# Allegro board OC_CONNECT_1_FRONTEND_LIFE-3.brd
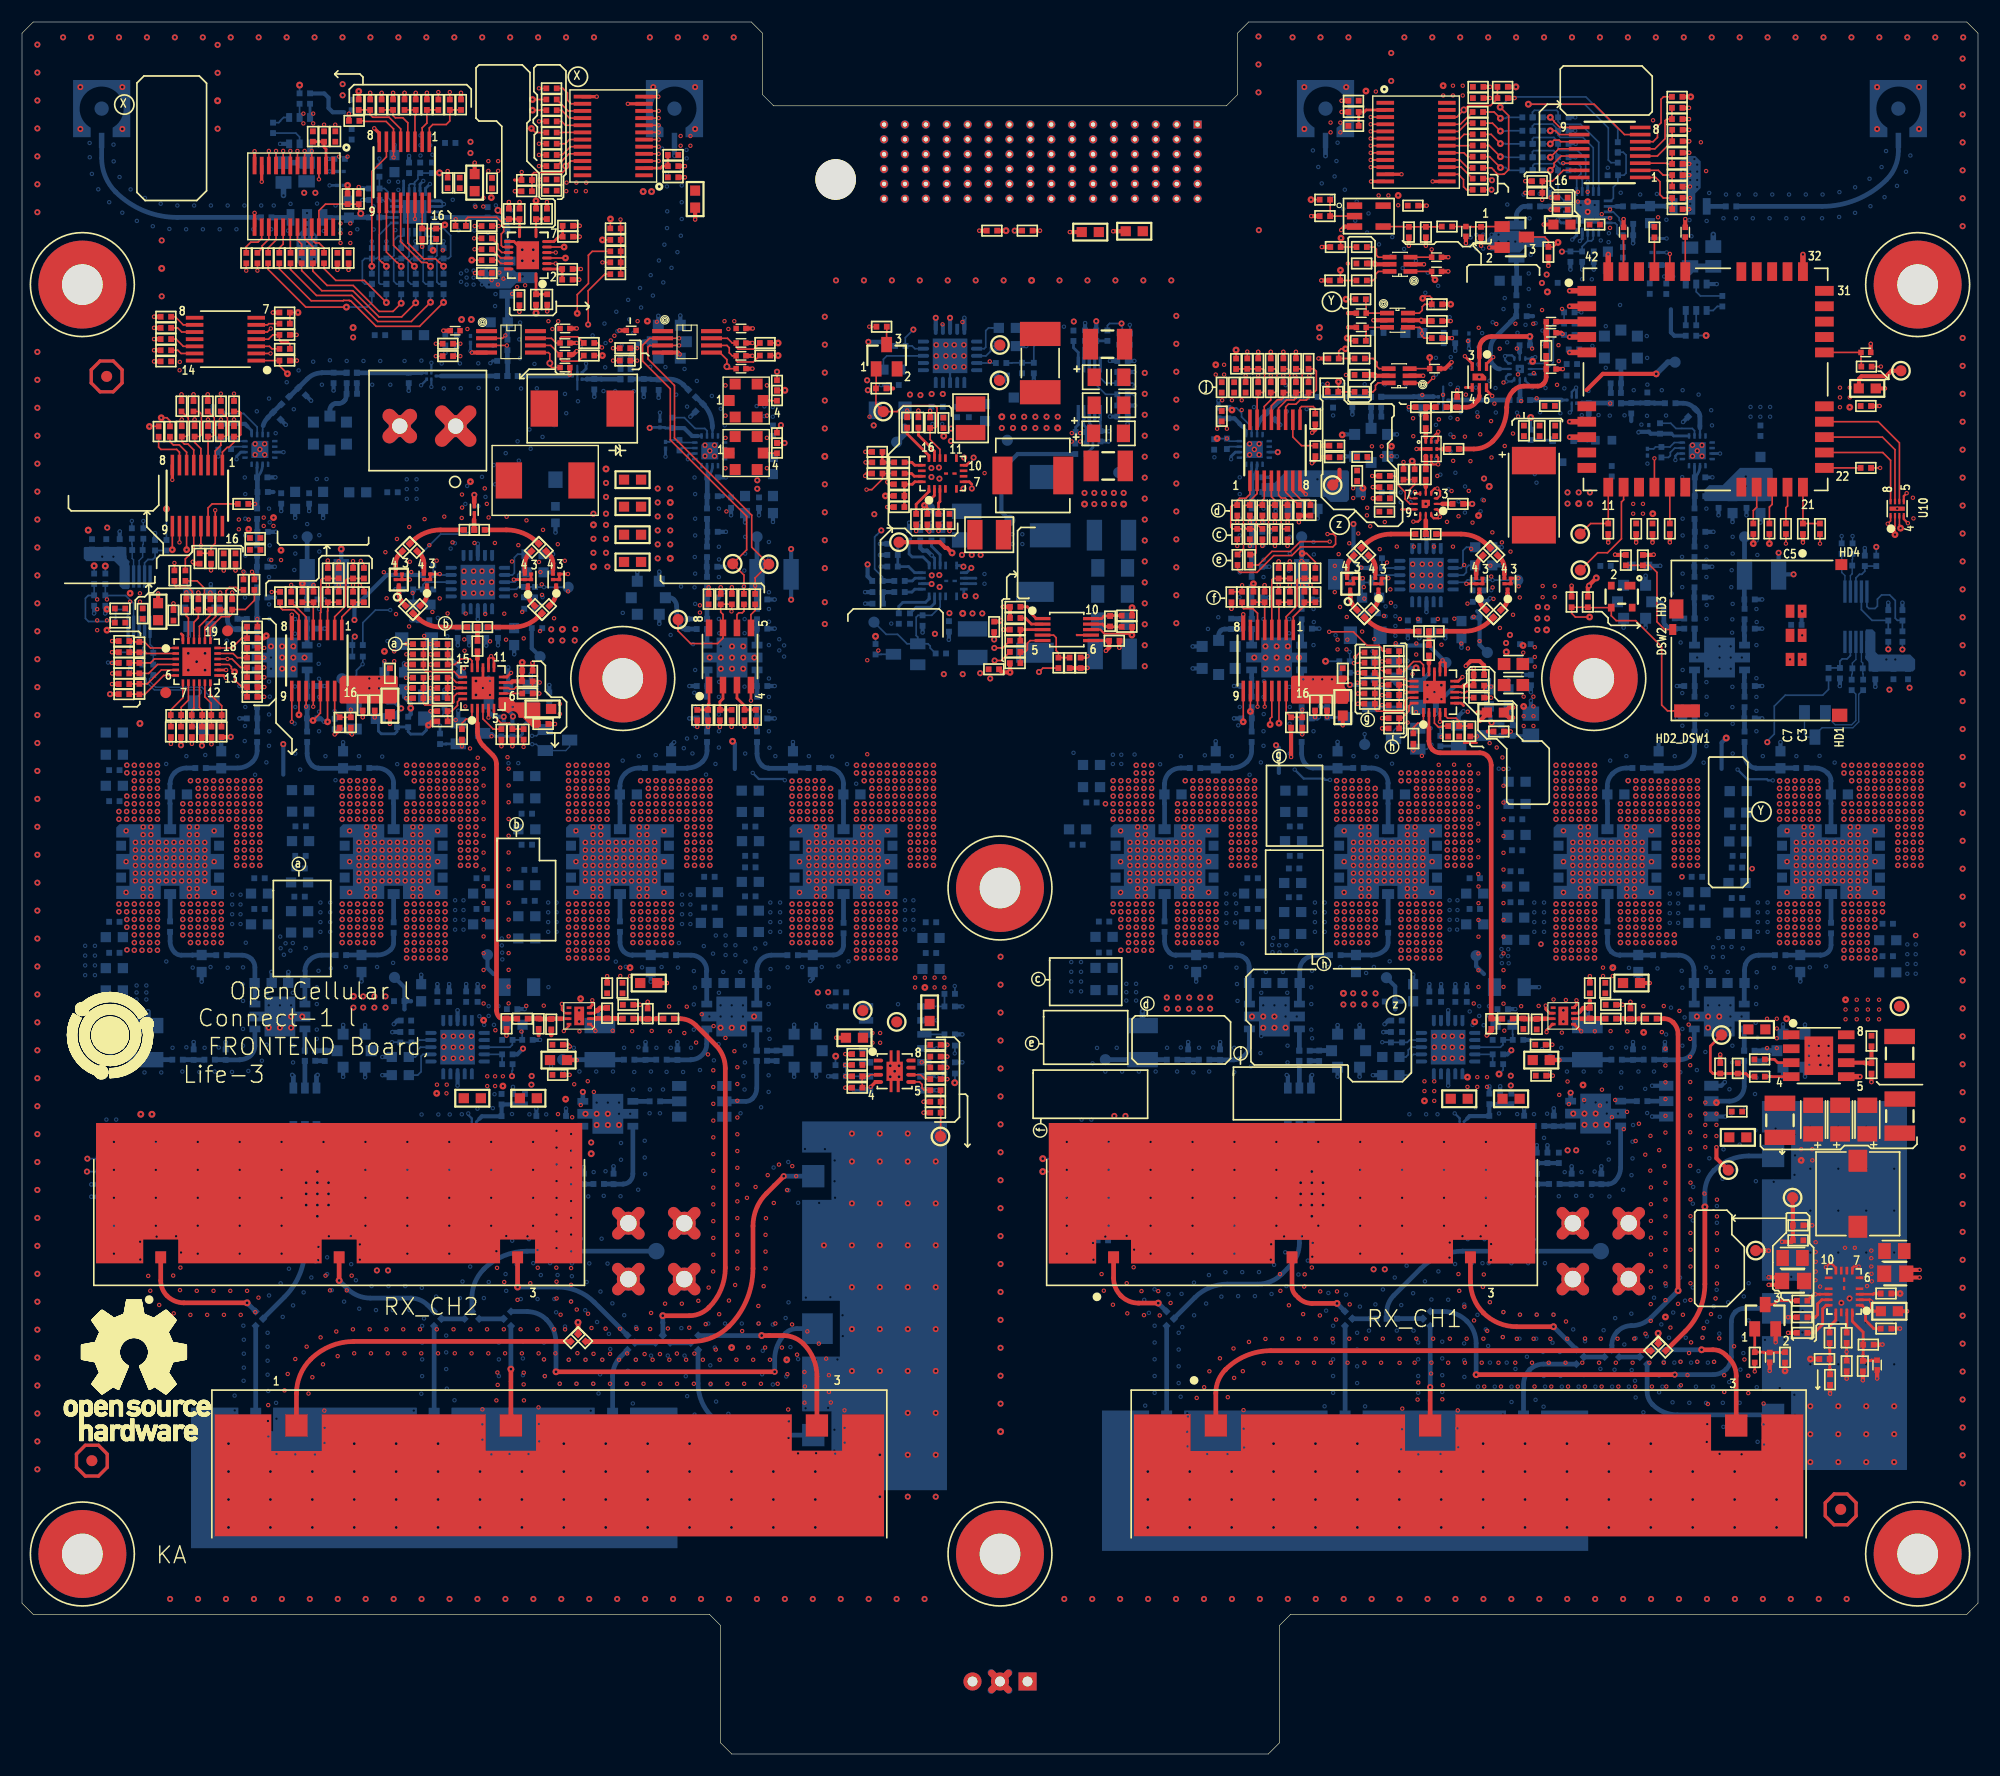
[diagram p0: board, top side]
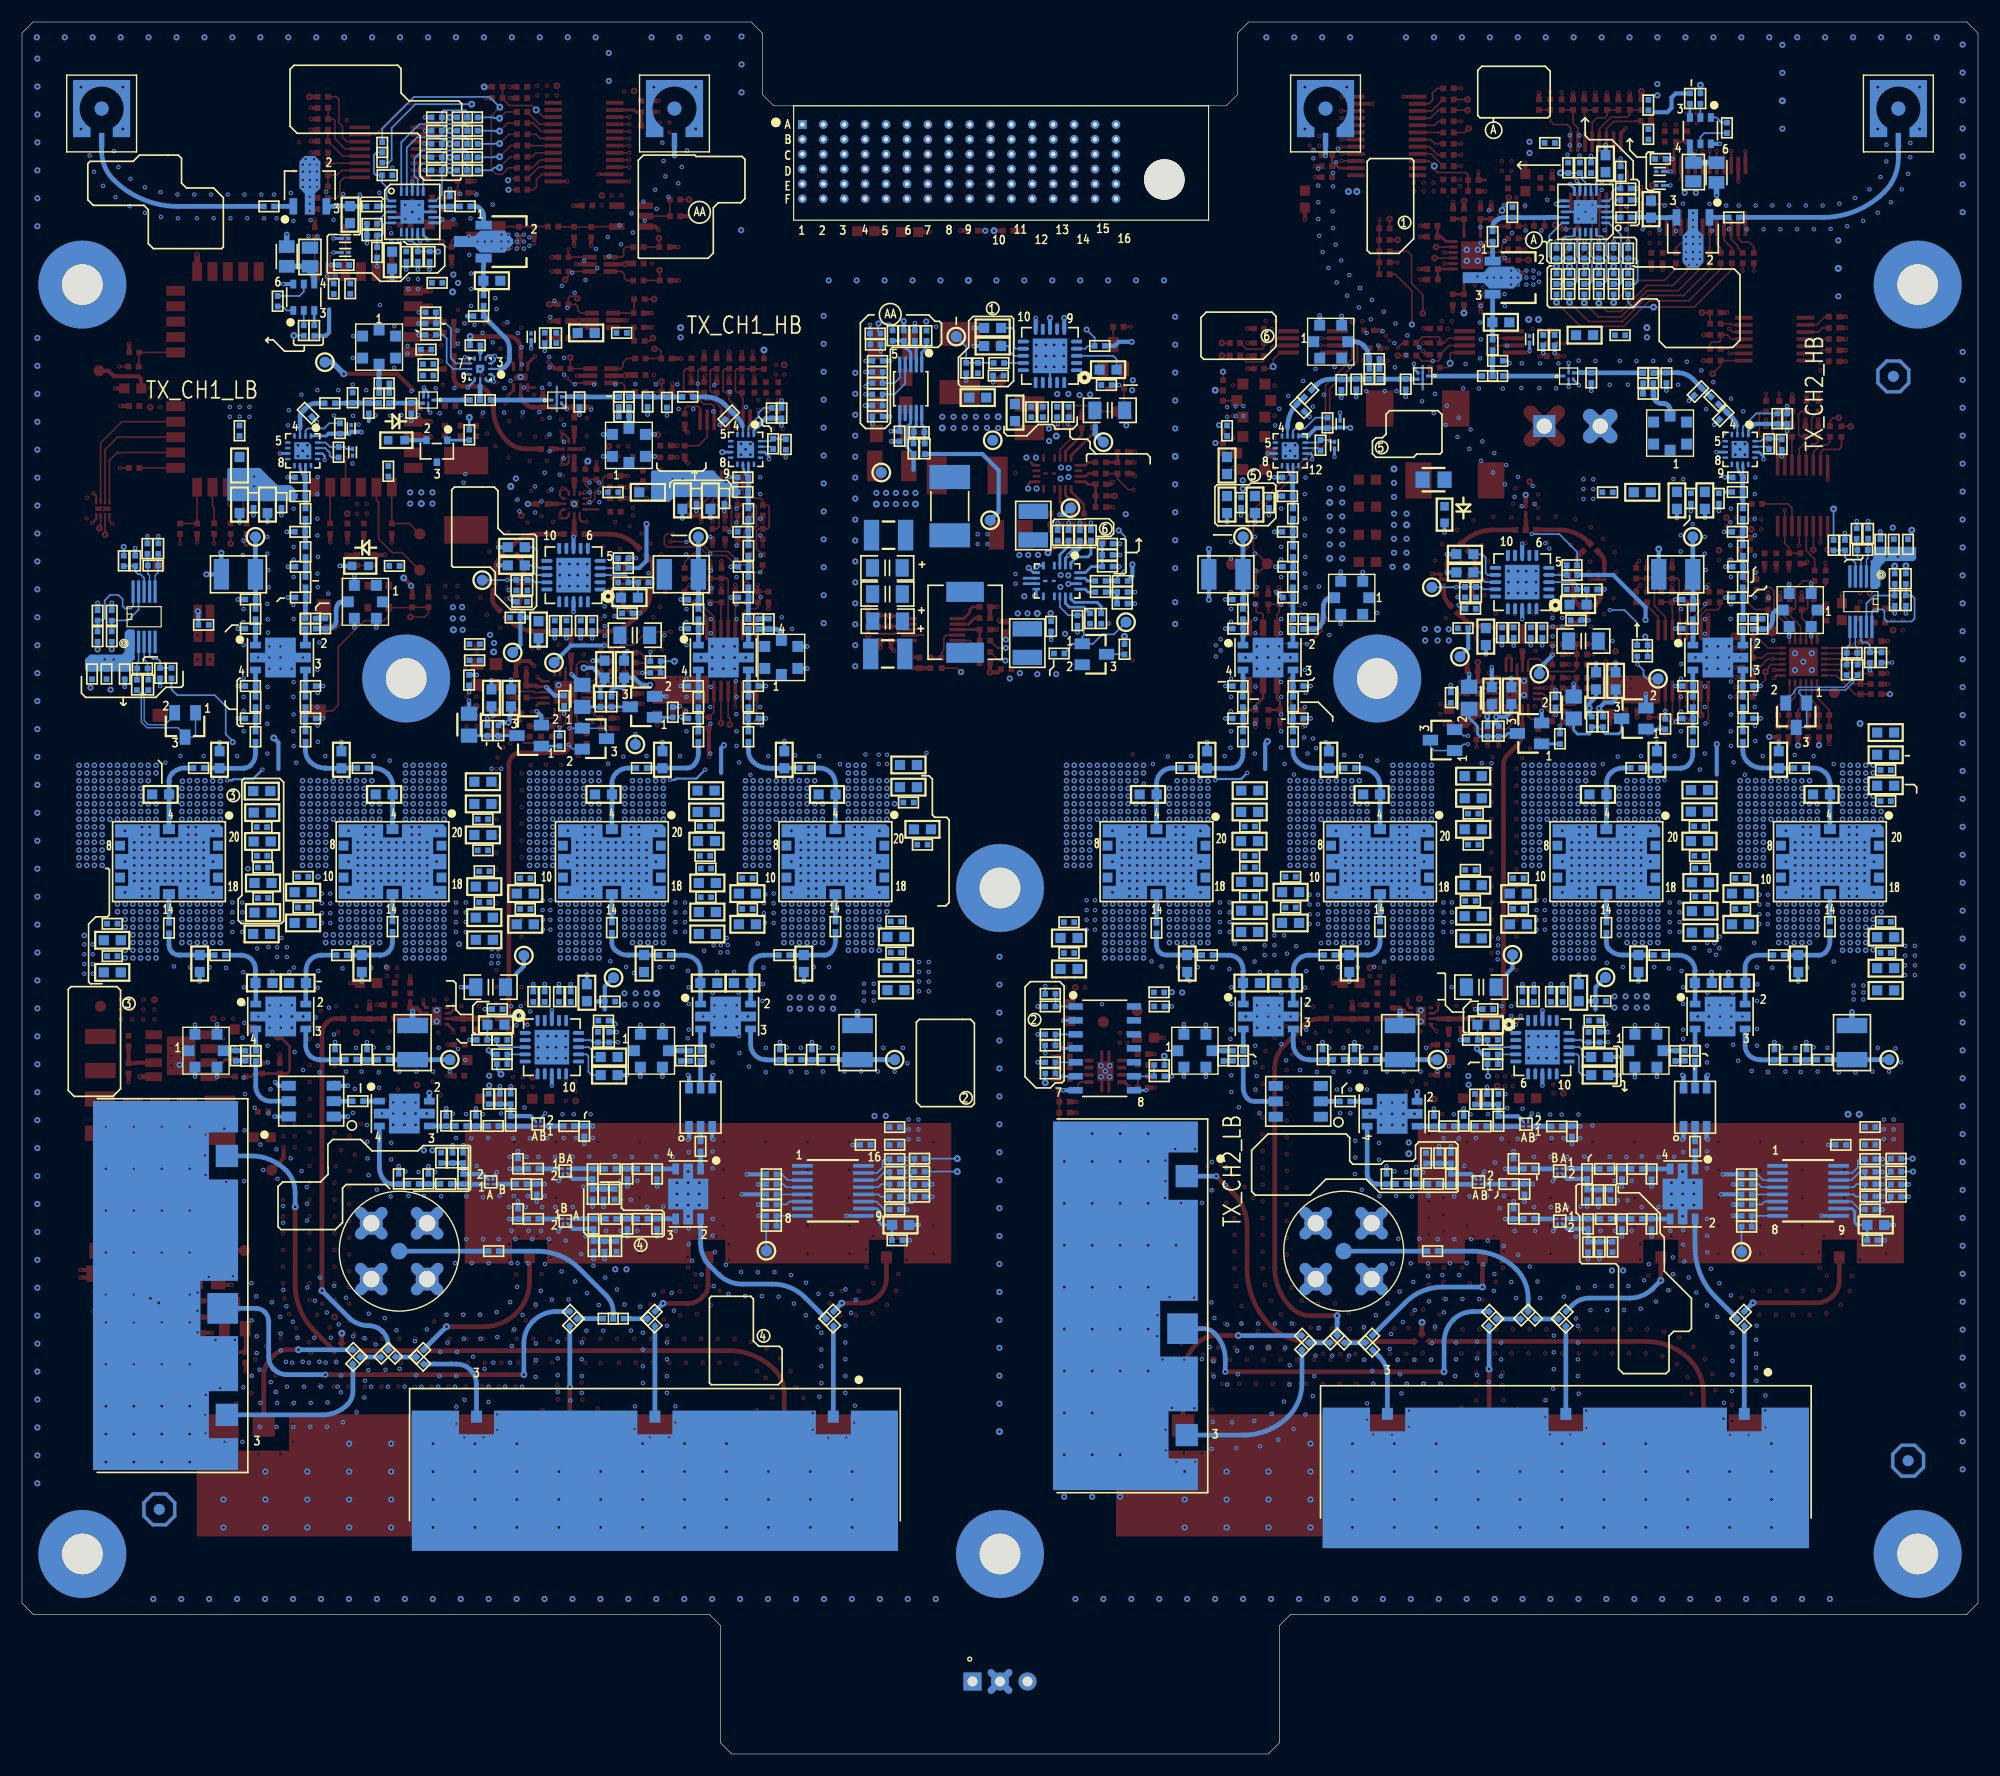
[diagram p1: board, bottom side, seen from below]

Outline 177.8 x 157.48 mm; copper layers: TOP, L2-GND1, L3-SIG1, L4-SIG2, L5-PWR, L6-GND2, L7-SIG3, L8-SIG4, L9-GND3, BOTTOM. Coordinates in mm from the lower left corner of the outline.
Outline path: 0,156.46 0,13.72 1.02,12.7 62.48,12.7 63.5,11.68 63.5,1.02 64.52,0 113.28,0 114.3,1.02 114.3,11.68 115.32,12.7 176.78,12.7 177.8,13.72 177.8,156.46 176.78,157.48 111.51,157.48 110.49,156.46 110.49,150.88 109.47,149.86 68.33,149.86 67.31,150.88 67.31,156.46 66.29,157.48 1.02,157.48 0,156.46

## Design rules (mm)
net group 2GMODULE_RF_ANT: nets 2GMODULE_RF_ANT N19574611
net group DP1: nets CH1_PRE_I2C_2_SCL CH1_PRE_I2C_2_SDA
net group DP2: nets CH1_RF_I2C_4_SCL CH1_RF_I2C_4_SDA
net group DP3: nets CH1_RX_I2C_2_SCL CH1_RX_I2C_2_SDA
net group DP4: nets CH2_PRE_I2C_2_SCL CH2_PRE_I2C_2_SDA
net group DP5: nets CH2_RF_I2C_4_SCL CH2_RF_I2C_4_SDA
net group DP6: nets CH2_RX_I2C_2_SCL CH2_RX_I2C_2_SDA
net group DP7: nets L_TIVA_TRXFECONN_I2C2_SCLK L_TIVA_TRXFECONN_I2C2_SDA
net group DP8: nets L_TIVA_TRXFECONN_I2C2_SCLK_L L_TIVA_TRXFECONN_I2C2_SDA_L
net group DP11: nets L_TIVA_TRXFECONN_I2C4_SCLK L_TIVA_TRXFECONN_I2C4_SDA
net group DP12: nets L_TIVA_TRXFECONN_I2C4_SCLK_L L_TIVA_TRXFECONN_I2C4_SDA_L
net group DP13: nets SYS_I2C_2_SCL SYS_I2C_2_SDA
net group DP15: nets SYS_I2C_4_SCL SYS_I2C_4_SDA
net group DP16: nets WD_I2C_2_SCL WD_I2C_2_SDA
net group DP17: nets STP_I2C_2_SCL STP_I2C_2_SDA
net group N18611317: nets N18611317 N18611323
net group 5 MIL: nets ADT7481_1_D1_N ADT7481_1_D1_N_R ADT7481_1_D1_P ADT7481_1_D1_P_R ADT7481_1_D2_N ADT7481_1_D2_N_R ADT7481_1_D2_P ADT7481_1_D2_P_R ADT7481_D1_N ADT7481_D1_P ADT7481_D2_N ADT7481_D2_P N19733122 N19733158 N19733262 N19733267
net group PWR: nets 3.3_BAT_2G CH1_3P3V_397LF CH1_3P3V_CS CH1_3P3V_DAT2 CH1_3P3V_HB_PD1 CH1_3P3V_HB_PD2 CH1_3P3V_LB_PD1 CH1_3P3V_LB_PD2 CH1_+5P0V_HBPA1_VCTRL CH1_+5P0V_HBPA1_VCTRL_FB CH1_+5P0V_HBPA2_VCTRL CH1_+5P0V_HBPA2_VCTRL_FB CH1_+5P0V_LBPA1_VCTRL CH1_+5P0V_LBPA1_VCTRL_FB CH1_+5P0V_LBPA2_VCTRL CH1_+5P0V_LBPA2_VCTRL_FB CH2_3P3V_CS CH2_3P3V_DAT2 CH2_3P3V_HB_PD1 CH2_3P3V_HB_PD2 CH2_3P3V_LB_PD1 CH2_3P3V_LB_PD2 CH2_+5P0V_HBPA1_VCTRL_FB CH2_+5P0V_HBPA2_VCTRL_FB CH2_+5P0V_LBPA1_VCTRL CH2_+5P0V_LBPA1_VCTRL_FB CH2_+5P0V_LBPA2_VCTRL CH2_+5P0V_LBPA2_VCTRL_FB INV_3P3V LT8640_INT_VCC3 LT8640_INT_VCC_1 LT8640_INT_VCC_2 N04661 N2429678 N4628364 N18610577 N18647521 N18647530 N18648415 N18648424 N18669960 N18670083 N19200579 N19579922 V2P5 V5P7_PRE
net group RF: nets CH1_ATT_OUT CH1_HB_LB_SEL CH1_HB_RF_CON CH1_HBPA_RF_IN CH1_HBPA_RF_PATH1_IN CH1_HBPA_RF_PATH1_OUT CH1_HBPA_RF_PATH2_IN CH1_HBPA_RF_PATH2_OUT CH1_LB_RF_CON CH1_LBPA_RF_IN CH1_LBPA_RF_PATH1_IN CH1_LBPA_RF_PATH1_OUT CH1_LBPA_RF_PATH2_IN CH1_LBPA_RF_PATH2_OUT CH1_PA_HB_ISO CH1_PA_LB_ISO CH1_RF_DET_HB_FWR_IN CH1_RF_DET_HB_REV_IN CH1_RF_DET_LB_FWR_IN CH1_RF_DET_LB_REV_IN CH1_RF_HB_BAND2_IN CH1_RF_HB_BAND2_OUT CH1_RF_HB_BAND3_IN CH1_RF_HB_BAND3_OUT CH1_RF_HB_CPL_OUT CH1_RF_HB_PA_OUT CH1_RF_INTANT CH1_RF_INTANT_C CH1_RF_LB_BAND5_IN CH1_RF_LB_BAND5_OUT CH1_RF_LB_BAND8_IN CH1_RF_LB_BAND8_OUT CH1_RF_LB_CPL_OUT CH1_RF_LB_PA_OUT CH1_RF_RX_OUT CH1_RX_ATTN_IN CH1_RX_ATTN_OUT CH1_RX_FILTER_IN CH1_RX_FILTER_OUT CH1_RX_HB_BAND2 CH1_RX_HB_BAND2_SAWIN CH1_RX_HB_BAND2_SAWOUT CH1_RX_HB_BAND3 CH1_RX_HB_BAND3_SAWIN CH1_RX_HB_BAND3_SAWOUT CH1_RX_LB_BAND5 CH1_RX_LB_BAND5_SAWIN CH1_RX_LB_BAND5_SAWOUT CH1_RX_LB_BAND8 CH1_RX_LB_BAND8_SAWIN CH1_RX_LB_BAND8_SAWOUT CH1_RX_LNA_IN CH1_RX_LNA_OUT CH1_RX_UE_SIM_MODULE CH1_TX_ATT_IN CH1_TX_PREAMP_OUT CH1_TX_RF_IN CH1_TX_RF_IN_C CH1_TX_UE_SIM_MODULE CH1_UE_SIM_ANT CH2_ATT_OUT CH2_HB_RF_CON CH2_HBPA_RF_IN CH2_HBPA_RF_PATH1_IN CH2_HBPA_RF_PATH1_OUT CH2_HBPA_RF_PATH2_IN CH2_HBPA_RF_PATH2_OUT CH2_LB_RF_CON CH2_LBPA_RF_IN CH2_LBPA_RF_PATH1_IN CH2_LBPA_RF_PATH1_OUT CH2_LBPA_RF_PATH2_IN CH2_LBPA_RF_PATH2_OUT CH2_PA_HB_ISO CH2_PA_LB_ISO CH2_RF_DET_HB_FWR_IN CH2_RF_DET_HB_REV_IN CH2_RF_DET_LB_FWR_IN CH2_RF_DET_LB_REV_IN CH2_RF_HB_BAND2_IN CH2_RF_HB_BAND2_OUT CH2_RF_HB_BAND3_IN CH2_RF_HB_BAND3_OUT CH2_RF_HB_CPL_OUT CH2_RF_HB_PA_OUT CH2_RF_INTANT CH2_RF_INTANT_C CH2_RF_LB_BAND5_IN CH2_RF_LB_BAND5_OUT CH2_RF_LB_BAND8_IN CH2_RF_LB_BAND8_OUT CH2_RF_LB_CPL_OUT CH2_RF_LB_PA_OUT CH2_RF_RX_OUT CH2_RX_ATTN_IN CH2_RX_ATTN_OUT CH2_RX_FILTER_IN CH2_RX_FILTER_OUT CH2_RX_HB_BAND2 CH2_RX_HB_BAND2_SAWIN CH2_RX_HB_BAND2_SAWOUT CH2_RX_HB_BAND3 CH2_RX_HB_BAND3_SAWIN CH2_RX_HB_BAND3_SAWOUT CH2_RX_LB_BAND5 CH2_RX_LB_BAND5_SAWIN CH2_RX_LB_BAND5_SAWOUT CH2_RX_LB_BAND8 CH2_RX_LB_BAND8_SAWIN CH2_RX_LB_BAND8_SAWOUT CH2_RX_LNA_IN CH2_TX_ATT_IN CH2_TX_PREAMP_OUT CH2_TX_RF_IN CH2_TX_RF_IN_C N00110 N00143 N00329 N00458 N02075 N02095 N02183 N02223 N04052 N08320 N11655 N12237 N14373 N21578 N25591 N64340 N64506 N64636 N96728 N96732 N96744 N96754 N96832 N96834 N96850 N96940 N96998 N97078 N97090 N147495 N154213 N848823 N2424100 N2424108 N2424140 N2424142 N2424154 N2424178 N2424184 N2424214 N2424216 N2424226 N2438198 N2438200 N2438214 N2438224 N2438262 N2438268 N2438278 N2438330 N2438466 N2438478 N2438588 N2438754 N2442693 N2442695 N2442709 N2442719 N2442759 N2442761 N2442775 N2442777 N2442833 N2442885 N2442965 N2442977 N2447093 N2447239 N2447265 N2452276 N2452306 N2452334 N2452522 N2463012 N2463020 N2463052 N2463054 N2463066 N2463090 N2463096 N2463126 N2463128 N2463138 N3141586 N3404619 N3406573 N3415333 N3417290 N3490489 N3590785 N3590789 N3590859 N3590891 N3590917 N3591163 N3604901 N3605045 N3605211 N3605275 N3605339 N3948020 N17645285 N17646328 N17646554 N17647866 N17649352 N17649550 N17672390 N17683367 N18032513 N18032583 N18032800 N18032879 N18610670 N18610924 N18794636 N18796030 N18854444 N18854583 N19068885 N19069117 N19069446 N19069497 N19121408 N19121856 N19122168 N19122434 N19123805 N19124252 N19125045 N19125667 N19135273 N19135893 N19138223 N19138254 N19138322 N19173620 N19173696 N19175841 N19175884 N19178560 N19180279 N19180630 N19180667 N19188677 N19188736 N19196616 N19198940 N19198946 N19200659 N19584969 N19638038 N19639876 N19640647 N19674022 N19674147 N19674332 N19674512 N19674692 N19674872 N19674973 N19675069 N19675251 N19675433 N19675611 N19675791
net group SIGNAL: nets +IN3 +IN4 +IN5 +IN6 -IN3 -IN4 -IN5 -IN6 AOSEL_FPGA CH1_RF_A/D_A0_CPU CH1_RF_A/D_A1_CPU CH1_RF_DET_HB_F_DET_OUT CH1_RF_DET_HB_R_DET_OUT CH1_RF_DET_LB_F_DET_OUT CH1_RF_DET_LB_R_DET_OUT CH1_RX_ATTN_1DB CH1_RX_ATTN_2DB CH1_RX_ATTN_4DB CH1_RX_ATTN_8DB CH1_RX_ATTN_ENB CH1_RX_ATTN_P5DB CH1_RX_I2C_A0 CH1_TX_ATTN_1DB CH1_TX_ATTN_2DB CH1_TX_ATTN_4DB CH1_TX_ATTN_8DB CH1_TX_ATTN_ENB CH1_TX_ATTN_P5DB CH2_RF_A/D_A0_CPU CH2_RF_A/D_A1_CPU CH2_RF_DET_HB_F_DET_OUT CH2_RF_DET_HB_R_DET_OUT CH2_RF_DET_LB_F_DET_OUT CH2_RF_DET_LB_R_DET_OUT CH2_RX_ATTN_ENB CO2_WD CO3_WD CO4_WD CO5_WD CO6_WD COPOL_FPGA LDO_5V_ENB N04312 N04329 N04350 N05007 N05085 N2429650 N2429652 N2429654 N2429660 N2429710 N2429712 N2463246 N2463410 N3464918 N3470389 N3470663 N4459963 N4459967 N4462045 N4522849 N4523062 N4628420 N19183187 N19183205 PG_REG_5P7V_1 PG_REG_5P7V_2 PGOOD_LDO SHDN_SW

## Placement (name value [footprint] x y rotation side)
ATT2602  YAT10  [SON65P200X200X85-7N_A]  132.47 125.2 180 top
C1P16  0.1UF  [SMC0402A]  54.93 129.44 90 top
C1P17  0.1UF  [SMC0402A]  64.91 129.62 90 top
C1P20  0.1UF  [SMC0402A]  48.91 129.62 90 top
C1P21  0.1UF  [SMC0402A]  38.92 129.41 90 top
C126  47uF  [CAPMP3216X120N]  167.74 57.68 90 top
C141  22uF  [CC1210]  170.69 58 90 top
C154  1000uF  [CAPMP7343X200N_VS]  137.43 114.45 270 top
C157  33pF  [CC0402]  139.36 120.31 270 top
C408  0.1uF  [CC0402]  137.95 120.31 90 top
C409  10nF  [CC0402]  136.53 120.31 90 top
C410  0.1uF  [CC0402]  167.61 122.57 0 top
C411  1uF  [CC0603]  167.73 124.16 0 top
C412  0.1uF  [CC0402]  136.65 100.91 0 bottom
C413  0.1uF  [CC0402]  136.65 99.44 0 bottom
C414  0.1uF  [CC0402]  138.87 122.57 180 top
C415  0.1uF  [CC0402]  121.6 125.39 180 top
C416  0.1uF  [CC0402]  121.77 135.52 180 top
C417  0.1uF  [CC0402]  128.62 130.29 0 top
C420  10PF  [SMC0402A]  139.44 130.24 270 top
C421  10PF  [SMC0402A]  139.44 129.22 270 top
C422  10PF  [SMC0402A]  139.44 125.93 270 top
C492  10pF  [SMC0402A]  168.63 35.81 0 top
C495  0.1uF  [CC0402]  169.44 41.87 0 top
C498  1uF  [CC0805]  160.99 43 180 top
C499  1uF  [CC0805]  170.28 43.67 0 top
C500  1uF  [CC0603]  169.74 40.26 0 top
C501  0.1uF  [CC0402]  161.82 38.29 180 top
C510  47uF  [CAPMP3216X120N]  165.27 57.68 90 top
C511  47uF  [CAPMP3216X120N]  162.81 57.68 90 top
C512  0.1uF  [CC0402]  161.29 102.67 180 bottom
C513  22uF  [CC1210]  159.8 57.62 90 top
C697  0.1uF  [C0402]  88.17 138.51 180 top
C698  0.1uF  [C0402]  91.39 138.51 0 top
C1506  1000pF  [C0201]  148.43 136.53 0 bottom
C1507  1000pF  [C0201]  28.94 143.89 180 bottom
C1519  100nF  [C0201]  148.43 137.79 0 bottom
C1520  100nF  [C0201]  28.94 142.62 180 bottom
C1802  10000pF  [C0603]  97.95 48.1 180 bottom
C1885  0.1uF  [CC0402]  157.5 36.06 270 top
C1913  0.1uF  [C0402]  96.25 120.2 0 bottom
C1914  10uF  [C0603]  12.37 103.86 90 top
C1931  10uF  [C0805]  170.2 45.73 0 top
C1932  10uF  [C0805]  160.94 45.1 180 top
C1975  1uF  [CC0603]  157.7 65.89 0 top
C1976  10uF  [CC1210]  170.67 63.69 270 top
C1977  0.1uF  [CC0402]  148.21 111.4 90 top
C1978  0.1uF  [CC0402]  146.72 111.4 90 top
C2002  10000pF  [C0603]  9.3 48.1 180 bottom
C2041  0.1uF  [CC0402]  126.44 140.78 0 top
C2042  0.1uF  [CC0402]  132.62 138.38 270 top
C2095  4.7uF  [C0805]  23.77 143.79 270 bottom
C2106  0.1uF  [C0402]  13.08 126.62 180 top
C2113  0.1uF  [C0402]  98.91 103 270 top
C2120  0.1uF  [CC0402]  155.89 58.41 180 top
C2200  10pF  [C0402]  108.37 119.07 270 bottom
C2201  10000pF  [C0603]  115.23 113.98 270 bottom
C2202  10uF  [C0603]  117.77 113.98 270 bottom
C2203  33pF  [C0402]  113.96 114.16 270 bottom
C2204  2.2uF  [C0402]  116.5 114.16 270 bottom
C2205  10pF  [C0402]  108.76 121.92 90 bottom
C2206  10pF  [C0402]  111.77 112.78 270 bottom
C2207  10pF  [C0402]  111.77 109.42 270 bottom
C2210  3.3PF  [C0402]  117.28 123.39 180 bottom
C2213  0.5pF  [C0402]  112.27 116.08 0 bottom
C2214  1pF  [C0402]  113.56 121.67 315 bottom
C2215  33pF  [C0402]  146.01 140.71 0 bottom
C2219  33pF  [C0402]  154.22 113.78 270 bottom
C2220  100pF  [C0201]  147.75 118.36 270 bottom
C2221  10000pF  [C0603]  155.49 113.6 270 bottom
C2222  2.2uF  [C0402]  156.76 113.78 270 bottom
C2223  10uF  [C0603]  158.03 113.6 270 bottom
C2224  10000pF  [C0603]  144.15 135.83 270 bottom
C2228  100pF  [C0402]  152.03 112.78 270 bottom
C2230  10pF  [C0402]  149.82 122.82 0 bottom
C2233  2.7PF  [C0402]  151.8 121.92 225 bottom
C2234  0.5pF  [C0402]  152.53 116.08 0 bottom
C2235  10000pF  [C0603]  139.98 139.06 180 top
C2236  10pF  [C0402]  135.69 123.11 180 bottom
C2237  47pF  [C0402]  136.61 123.11 0 bottom
C2240  2.2uF  [C0402]  129.24 128.75 270 bottom
C2241  10pF  [C0402]  130.28 128.75 270 bottom
C2242  0.1uF  [C0201]  131.52 128.85 270 bottom
C2245  100pF  [C0201]  147.88 120.52 90 bottom
C2301  10uF  [C0603]  97.22 87.91 0 bottom
C2302  2.2uF  [C0402]  97.22 86.51 0 bottom
C2303  10000pF  [C0603]  95.95 84.07 180 bottom
C2304  33pF  [C0402]  95.95 82.68 180 bottom
C2305  33pF  [C0402]  111.86 79.63 0 bottom
C2306  10000pF  [C0603]  111.86 78.23 0 bottom
C2307  2.2uF  [C0402]  111.86 76.84 0 bottom
C2308  10uF  [C0603]  111.86 75.44 0 bottom
C2310  33pF  [C0402]  106.63 89.65 180 bottom
C2311  10pF  [C0402]  108.53 72.63 0 bottom
C2313  10000pF  [C0603]  106.73 71.87 270 bottom
C2314  10000pF  [C0603]  104.62 87.25 0 bottom
C2315  33pF  [C0402]  98.36 75.69 0 bottom
C2316  10000pF  [C0603]  98.36 74.3 0 bottom
C2317  2.2uF  [C0402]  98.36 72.87 0 bottom
C2318  10uF  [C0603]  98.36 71.48 0 bottom
C2319  10uF  [C0603]  115.61 85.65 180 bottom
C2320  2.2uF  [C0402]  115.71 84.34 180 bottom
C2321  10000pF  [C0603]  115.58 83 180 bottom
C2322  33pF  [C0402]  115.71 81.66 180 bottom
C2323  33pF  [C0402]  115.63 80.52 180 bottom
C2324  10000pF  [C0603]  132.05 78.23 0 bottom
C2325  2.2uF  [C0402]  132.05 76.84 0 bottom
C2326  10uF  [C0603]  132.05 75.44 0 bottom
C2329  10pF  [C0402]  119.38 72.63 180 bottom
C2330  33pF  [C0402]  121.49 89.65 0 bottom
C2332  10000pF  [C0603]  121.26 71.87 270 bottom
C2333  10000pF  [C0603]  124.94 87.25 0 bottom
C2335  33pF  [C0402]  132.05 79.63 0 bottom
C2336  10000pF  [C0603]  115.5 79.2 180 bottom
C2337  2.2uF  [C0402]  115.63 77.9 180 bottom
C2338  10uF  [C0603]  115.5 76.56 180 bottom
C2400  10uF  [C0603]  135.9 86.39 180 bottom
C2401  2.2uF  [C0402]  135.9 84.99 180 bottom
C2402  10000pF  [C0603]  135.9 83.57 180 bottom
C2403  33pF  [C0402]  135.9 82.17 180 bottom
C2404  33pF  [C0402]  135.78 80.26 180 bottom
C2405  10000pF  [C0603]  152.25 78.36 0 bottom
C2406  2.2uF  [C0402]  135.78 77.44 180 bottom
C2407  10uF  [C0603]  152.25 75.56 0 bottom
C2410  100pF  [C0402]  146.86 89.65 180 bottom
C2411  12pF  [C0402]  148.74 72.63 0 bottom
C2413  10000pF  [C0603]  144.88 87.25 0 bottom
C2414  10000pF  [C0603]  146.91 71.87 270 bottom
C2415  33pF  [C0402]  152.25 79.76 0 bottom
C2416  10000pF  [C0603]  135.78 78.87 180 bottom
C2417  2.2uF  [C0402]  152.25 76.96 0 bottom
C2418  10uF  [C0603]  135.78 76.05 180 bottom
C2419  10uF  [C0603]  155.96 85.6 180 bottom
C2420  2.2uF  [C0402]  155.99 84.27 180 bottom
C2421  10000pF  [C0603]  155.97 82.97 180 bottom
C2422  33pF  [C0402]  155.97 81.66 180 bottom
C2423  33pF  [C0402]  155.89 80.59 180 bottom
C2424  10000pF  [C0603]  155.89 79.2 180 bottom
C2425  2.2uF  [C0402]  169.6 72.54 180 bottom
C2426  10uF  [C0603]  169.6 71.07 180 bottom
C2432  10000pF  [C0603]  165.2 87.25 0 bottom
C2433  10000pF  [C0603]  161.65 71.87 270 bottom
C2435  33pF  [C0402]  169.6 75.49 180 bottom
C2436  10000pF  [C0603]  169.6 73.99 180 bottom
C2437  2.2uF  [C0402]  155.89 77.83 180 bottom
C2438  10uF  [C0603]  155.89 76.5 180 bottom
C2439  100pF  [C0402]  161.75 89.65 0 bottom
C2500  100pF  [C0402]  138.02 64.49 180 top
C2501  10000pF  [C0603]  138.1 63.09 0 top
C2509  10000pF  [C0603]  133.93 94.69 0 top
C2515  10000pF  [C0603]  120.06 95.19 270 top
C2601  33pF  [C0402]  125.85 46.15 270 bottom
C2603  33pF  [C0402]  132.72 49.11 90 bottom
C2606  33pF  [C0402]  125.93 50.89 270 bottom
C2608  33pF  [C0402]  132.72 53.67 90 bottom
C2610  33pF  [C0402]  133.38 59.56 90 bottom
C2612  33pF  [C0402]  126.7 56.63 270 bottom
C2613  33pF  [C0402]  137.7 54.2 90 bottom
C2615  33pF  [C0402]  131.01 51.36 270 bottom
C2800  10pF  [C0402]  17.84 119.07 270 bottom
C2801  33pF  [C0402]  23.56 114.16 270 bottom
C2802  10000pF  [C0603]  24.83 113.98 270 bottom
C2803  2.2uF  [C0402]  26.1 114.16 270 bottom
C2804  10uF  [C0603]  27.37 113.98 270 bottom
C2805  10pF  [C0402]  17.35 121.41 90 bottom
C2806  10pF  [C0402]  21.37 112.78 270 bottom
C2807  10pF  [C0402]  21.37 109.42 270 bottom
C2810  3.3PF  [C0402]  23.93 123.06 225 bottom
C2813  0.5pF  [C0402]  21.83 116.08 0 bottom
C2814  33pF  [C0402]  32 139.71 0 bottom
C2815  1pF  [C0402]  23.16 121.67 315 bottom
C2819  33pF  [C0402]  64.45 113.78 270 bottom
C2820  10000pF  [C0603]  65.72 113.6 270 bottom
C2821  2.2uF  [C0402]  66.99 113.78 270 bottom
C2822  10uF  [C0603]  68.26 113.6 270 bottom
C2823  10000pF  [C0603]  33.86 144.6 90 bottom
C2824  100pF  [C0201]  58.5 119 270 bottom
C2828  100pF  [C0402]  62.27 112.78 270 bottom
C2830  10pF  [C0402]  60.91 123.7 315 bottom
C2833  2.7PF  [C0402]  61.57 122.4 225 bottom
C2834  0.5pF  [C0402]  62.77 116.08 0 bottom
C2835  10000pF  [C0603]  41.15 142.88 90 top
C2836  10pF  [C0402]  43.67 125.29 180 bottom
C2837  100pF  [C0402]  44.58 125.29 180 bottom
C2840  2.2uF  [C0402]  38.48 128.55 270 bottom
C2841  10pF  [C0402]  39.52 128.55 270 bottom
C2842  0.1uF  [C0201]  40.77 128.63 270 bottom
C2845  100pF  [C0201]  57.99 120.92 90 bottom
C2901  10uF  [C0603]  8.39 90.86 0 bottom
C2902  2.2uF  [C0402]  8.39 89.46 0 bottom
C2903  10000pF  [C0603]  8.39 88.04 0 bottom
C2904  33pF  [C0402]  8.39 86.64 0 bottom
C2905  33pF  [C0402]  8.39 75.67 0 bottom
C2906  10000pF  [C0603]  8.39 74.27 0 bottom
C2907  2.2uF  [C0402]  8.39 72.85 0 bottom
C2908  10uF  [C0603]  8.39 71.45 0 bottom
C2910  33pF  [C0402]  16.23 89.65 180 bottom
C2911  10pF  [C0402]  18.14 72.63 0 bottom
C2912  10000pF  [C0603]  16.33 71.87 270 bottom
C2914  10000pF  [C0603]  14.22 87.25 0 bottom
C2915  33pF  [C0402]  21.59 79.63 0 bottom
C2916  10000pF  [C0603]  21.59 78.23 0 bottom
C2917  2.2uF  [C0402]  21.59 76.84 0 bottom
C2918  10uF  [C0603]  21.59 75.44 0 bottom
C2919  10uF  [C0603]  25.32 85.68 180 bottom
C2920  2.2uF  [C0402]  25.33 84.35 180 bottom
C2921  10000pF  [C0603]  25.32 83 180 bottom
C2922  33pF  [C0402]  25.31 81.66 180 bottom
C2923  33pF  [C0402]  25.23 80.52 180 bottom
C2924  10000pF  [C0603]  25.23 79.25 180 bottom
C2925  2.2uF  [C0402]  25.23 77.95 180 bottom
C2926  10uF  [C0603]  25.23 76.63 180 bottom
C2929  33pF  [C0402]  31.09 89.65 0 bottom
C2930  10pF  [C0402]  28.98 72.63 180 bottom
C2932  10000pF  [C0603]  30.86 71.87 270 bottom
C2933  10000pF  [C0603]  34.54 87.25 0 bottom
C2935  33pF  [C0402]  41.78 79.63 0 bottom
C2936  10000pF  [C0603]  41.78 78.23 0 bottom
C2937  2.2uF  [C0402]  41.78 76.84 0 bottom
C2938  10uF  [C0603]  41.78 75.44 0 bottom
C3000  10uF  [C0603]  45.89 86.89 180 bottom
C3001  2.2uF  [C0402]  45.89 85.5 180 bottom
C3002  10000pF  [C0603]  45.89 84.07 180 bottom
C3003  33pF  [C0402]  45.89 82.68 180 bottom
C3004  33pF  [C0402]  46.14 80.39 180 bottom
C3005  10000pF  [C0603]  45.89 78.99 180 bottom
C3006  2.2uF  [C0402]  46.14 77.57 180 bottom
C3007  10uF  [C0603]  45.89 76.17 180 bottom
C3010  100pF  [C0402]  57.1 89.65 180 bottom
C3013  10000pF  [C0603]  55.12 87.25 0 bottom
C3014  10000pF  [C0603]  57.15 71.87 270 bottom
C3015  33pF  [C0402]  62.48 79.76 0 bottom
C3016  10000pF  [C0603]  62.48 78.36 0 bottom
C3017  2.2uF  [C0402]  62.48 76.96 0 bottom
C3018  10uF  [C0603]  62.48 75.56 0 bottom
C3019  10uF  [C0603]  66.21 85.65 180 bottom
C3020  2.2uF  [C0402]  66.2 84.32 180 bottom
C3021  10000pF  [C0603]  66.22 83 180 bottom
C3022  33pF  [C0402]  66.21 81.66 180 bottom
C3023  33pF  [C0402]  66.2 80.62 180 bottom
C3024  10000pF  [C0603]  66.2 79.3 180 bottom
C3025  2.2uF  [C0402]  66.2 77.98 180 bottom
C3026  10uF  [C0603]  66.2 76.68 180 bottom
C3030  100pF  [C0402]  71.98 89.65 0 bottom
C3032  10000pF  [C0603]  75.44 87.25 0 bottom
C3033  10000pF  [C0603]  71.88 71.87 270 bottom
C3035  33pF  [C0402]  82.62 75.62 0 bottom
C3036  10000pF  [C0603]  82.62 74.2 0 bottom
C3037  2.2uF  [C0402]  82.62 72.83 0 bottom
C3038  10uF  [C0603]  82.62 71.38 0 bottom
C3109  10000pF  [C0603]  47.32 95.02 0 top
C3112  100pF  [C0201]  41.11 113.13 270 top
C3115  10000pF  [C0603]  33.44 95.32 270 top
C3201  33pF  [C0402]  35.45 46.1 270 bottom
C3203  33pF  [C0402]  42.21 49.11 90 bottom
C3206  33pF  [C0402]  35.53 50.84 270 bottom
C3208  33pF  [C0402]  42.21 53.67 90 bottom
C3209  33pF  [C0402]  140.88 126.38 0 bottom
C3210  33pF  [C0402]  43.59 59.54 90 bottom
C3212  33pF  [C0402]  36.91 56.61 270 bottom
C3213  33pF  [C0402]  47.91 54.18 90 bottom
C3215  33pF  [C0402]  41.22 51.36 270 bottom
C3500  10uF  [CAPC3225X270N]  86.42 101 270 bottom
C3501  10uF  [CAPC3225X270N]  85.87 111.69 90 bottom
C3502  1uF  [C0402]  84.26 102.53 270 bottom
C3503  0.1uF  [C0402]  82.67 110.8 90 bottom
C3504  1uF  [C0402]  83.67 110.8 90 bottom
C3505  22uF  [CC1210]  99.1 100.02 0 bottom
C3506  47uF  [C1206]  99.12 103 0 bottom
C3507  47uF  [C1206]  99.13 105.47 0 bottom
C3508  47uF  [C1206]  99.14 107.84 0 bottom
C3509  22uF  [CC1210]  99.03 110.82 0 bottom
C3510  1uF  [C0402]  81.65 110.8 90 bottom
C3511  0.1uF  [C0402]  79.7 103.24 270 bottom
C3512  10pF  [C0402]  79.13 110.04 180 bottom
C3513  10uF  [CAPC3225X270N]  87.92 110.86 0 top
C3514  10uF  [CAPC3225X270N]  86.23 121.45 90 top
C3515  1uF  [C0402]  84.31 112.28 270 top
C3516  0.1uF  [C0402]  83.31 112.28 270 top
C3517  1uF  [C0402]  83.76 121.03 90 top
C3518  22uF  [CC1210]  98.73 117.12 0 top
C3519  47uF  [C1206]  98.77 120.08 0 top
C3520  47uF  [C1206]  98.81 122.64 0 top
C3521  47uF  [C1206]  98.81 125.18 0 top
C3522  22uF  [CC1210]  98.67 128.19 0 top
C3523  1uF  [C0402]  82.29 112.28 270 top
C3524  0.1uF  [C0402]  80.46 121.07 90 top
C3525  10pF  [C0402]  79.73 113.38 180 top
C3600  10uF  [C0603]  130.85 102.23 270 bottom
C3604  10000pF  [C0603]  122.59 105.14 180 bottom
C3608  22uF  [C1206]  122.1 101.72 180 bottom
C3609  10uF  [C0603]  132.87 109.73 0 bottom
C3610  10000pF  [C0603]  132.87 108.07 0 bottom
C3611  10uF  [C0603]  126.46 69.22 90 bottom
C3615  10000pF  [C0603]  134.72 66.31 0 bottom
C3619  22uF  [C1206]  135.2 69.73 0 bottom
C3620  10uF  [C0603]  124.43 61.72 180 bottom
C3621  10000pF  [C0603]  124.43 63.38 180 bottom
C3800  10uF  [C0603]  44.74 101.6 270 bottom
C3804  10000pF  [C0603]  36.35 104.51 180 bottom
C3808  22uF  [C1206]  35.87 101.19 180 bottom
C3809  10uF  [C0603]  46.64 109.09 0 bottom
C3810  10000pF  [C0603]  46.64 107.44 0 bottom
C3811  10uF  [C0603]  36.29 69.22 90 bottom
C3815  10000pF  [C0603]  44.73 66.31 0 bottom
C3819  22uF  [C1206]  45.16 69.73 0 bottom
C3820  10uF  [C0603]  34.39 61.72 180 bottom
C3821  10000pF  [C0603]  34.39 63.38 180 bottom
C4013  1uF  [C0402]  83.03 64.49 0 top
C4018  4.7uF  [C0603]  75.67 65.13 180 top
C4019  10000pF  [C0402]  83.03 61.36 0 top
C4100  10uF  [C0603]  87.54 121.97 270 bottom
C4104  10000pF  [C0603]  79.08 125.87 180 bottom
C4108  22uF  [C1206]  78.92 122.17 180 bottom
C4109  10uF  [C0603]  89.57 129.66 0 bottom
C4110  10000pF  [C0603]  89.57 128.01 0 bottom
C4200  0.1uF  [C0402]  137.16 97.65 90 bottom
C4201  0.1uF  [C0402]  74.42 67.97 180 bottom
C4203  0.1uF  [C0402]  128.52 95.77 270 bottom
C4206  0.1uF  [C0402]  47.93 96.05 270 bottom
C4208  0.1uF  [C0402]  38.4 95.62 270 bottom
C4317  4.7uF  [C0805]  153.74 136.16 270 bottom
C4393  47pF  [C0402]  148.4 36.99 225 top
C4394  47pF  [C0402]  149.08 36.99 315 top
C4395  10pF  [C0402]  104.37 39.26 225 bottom
C4396  10pF  [C0402]  104.37 39.91 135 bottom
C4397  10pF  [C0402]  50.22 37.85 225 top
C4398  10pF  [C0402]  50.89 37.85 315 top
C4399  10pF  [C0402]  21.58 39.9 135 bottom
C4400  10pF  [C0402]  21.57 39.26 225 bottom
C4401  47pF  [C0402]  127.68 39.26 135 bottom
C4402  47pF  [C0402]  127.68 39.91 225 bottom
C4403  10pF  [C0402]  120.59 39.26 45 bottom
C4404  10pF  [C0402]  120.59 39.91 315 bottom
C4411  10pF  [C0402]  26.17 63.94 0 bottom
C4413  10pF  [C0402]  151.57 102.32 180 bottom
C4414  10pF  [C0402]  157.01 63.94 0 bottom
C4415  10pF  [C0402]  111.32 102.29 180 bottom
C4416  10pF  [C0402]  116.57 63.94 0 bottom
C4419  100pF  [C0402]  152.03 109.3 270 bottom
C4420  100pF  [C0402]  62.27 109.3 270 bottom
C4421  100pF  [C0402]  144.12 75.23 270 bottom
C4422  100pF  [C0402]  164.44 75.1 270 bottom
C4423  100pF  [C0402]  54.36 75.23 270 bottom
C4424  100pF  [C0402]  74.68 75.1 270 bottom
C4425  10pF  [C0402]  155.35 140.71 180 bottom
C4426  10pF  [C0402]  22.2 139.71 180 bottom
C4428  0.1uF  [C0402]  42.25 134.66 180 top
C4429  0.1uF  [C0402]  45.21 132.21 270 top
C4430  10uF  [C0603]  61.19 141.38 90 top
C4432  10uF  [C0603]  97.1 138.38 0 top
C4433  0.1uF  [C0402]  121.03 150.32 180 top
C4434  0.1uF  [C0402]  132.36 150.56 0 top
C4435  1uF  [C0402]  132.36 151.58 0 top
C4436  0.1uF  [C0402]  28.47 147.07 90 top
C4437  0.1uF  [C0402]  28.67 136.02 270 top
C4438  1uF  [C0402]  29.69 136.02 270 top
C4439  0.1uF  [C0402]  59.18 143.36 0 top
C4440  0.1uF  [C0402]  48.13 143.16 180 top
C4441  1uF  [C0402]  48.13 142.14 180 top
C4447  47pF  [C0402]  152.03 102.78 270 bottom
C4449  47pF  [C0402]  147.27 59.36 180 bottom
C4450  10pF  [C0402]  111.77 102.74 270 bottom
C4452  10pF  [C0402]  116.12 55.25 270 bottom
C4453  10pF  [C0402]  61.81 102.29 180 bottom
C4454  10pF  [C0402]  67.25 63.94 0 bottom
C4455  10pF  [C0402]  62.27 102.74 270 bottom
C4457  10pF  [C0402]  57.53 59.34 180 bottom
C4458  10pF  [C0402]  20.92 102.29 180 bottom
C4459  10pF  [C0402]  21.37 102.74 270 bottom
C4461  10pF  [C0402]  25.72 55.25 270 bottom
C4462  10pF  [C0402]  29.51 125.12 270 bottom
C4463  10pF  [C0402]  55.32 125.46 90 bottom
C4464  10pF  [C0402]  122.63 122.94 270 bottom
C4465  10pF  [C0402]  145.34 123.28 90 bottom
C4470  12pF  [C0402]  159.82 72.63 180 bottom
C4471  12pF  [C0402]  58.98 72.63 0 bottom
C4472  12pF  [C0402]  70.05 72.63 180 bottom
C4477  0.1uF  [C0402]  119.31 118.96 180 top
C4478  10pF  [C0402]  134.93 45.72 0 bottom
C4480  47pF  [C0402]  130.14 118.66 0 top
C4481  10pF  [C0402]  127.6 116.33 270 top
C4482  47pF  [C0402]  136.61 128.09 180 bottom
C4488  47pF  [C0402]  156.55 63.49 270 bottom
C4489  10pF  [C0402]  66.79 63.49 270 bottom
C4490  10pF  [C0402]  116.12 63.49 270 bottom
C4491  10pF  [C0402]  25.72 63.49 270 bottom
C4493  33pF  [C0402]  123.87 115.19 180 top
C4499  100pF  [C0402]  135.03 66.86 0 top
C4500  20pF  [C0402]  144.42 66.86 0 top
C4501  33pF  [C0402]  146.2 67.31 90 top
C4502  68pF  [C0402]  144.42 68.12 0 top
C4504  1000pF  [C0402]  142.52 69.64 90 top
C4505  1.8pF  [C0402]  133.55 66.4 270 top
C4507  1000pF  [C0402]  53.19 69.64 90 top
C4508  20pF  [C0402]  55.09 66.86 0 top
C4509  33pF  [C0402]  56.87 67.31 90 top
C4510  68pF  [C0402]  55.09 68.12 0 top
C4511  100pF  [C0402]  48.69 64.49 180 top
C4512  10000pF  [C0603]  48.77 63.09 0 top
C4513  100pF  [C0402]  45.49 66.86 0 top
C4514  1.8pF  [C0402]  44.04 66.4 270 top
C4515  0.1uF  [C0402]  111.23 124.26 90 top
C4516  10000pF  [C0603]  146.3 70.1 0 top
C4517  10000pF  [C0603]  56.97 70.1 0 top
C4518  10uF  [C0603]  101.1 138.45 0 top
C4519  100pF  [C0402]  137.52 140.71 180 bottom
C4520  100pF  [C0402]  135.84 132.15 270 bottom
C4521  100pF  [C0402]  104.54 63.13 180 bottom
C4522  100pF  [C0402]  144.95 63.13 180 bottom
C4523  47pF  [C0402]  134.97 57.1 180 bottom
C4524  47pF  [C0402]  139.29 51.83 180 bottom
C4525  100pF  [C0402]  124.26 48.65 0 bottom
C4526  100pF  [C0402]  124.34 53.2 0 bottom
C4527  100pF  [C0402]  147.39 35.79 315 bottom
C4528  100pF  [C0402]  141.63 35.79 225 bottom
C4529  100pF  [C0402]  141.63 36.43 135 bottom
C4530  47pF  [C0402]  147.39 36.43 45 bottom
C4531  100pF  [C0402]  133.15 109.33 225 top
C4532  100pF  [C0402]  133.43 103.68 315 top
C4533  100pF  [C0402]  127.89 100.36 270 top
C4534  100pF  [C0402]  134.08 103.68 225 top
C4535  100pF  [C0402]  121.7 103.68 315 top
C4536  100pF  [C0402]  122.34 103.68 225 top
C4537  100pF  [C0402]  133.79 109.33 315 top
C4538  100pF  [C0402]  121.41 109.33 225 top
C4539  100pF  [C0402]  122.06 109.33 315 top
C4540  100pF  [C0402]  130.52 113.67 180 top
C4541  100pF  [C0402]  44.12 137.97 270 bottom
C4542  100pF  [C0402]  44.12 128.12 270 bottom
C4543  100pF  [C0402]  55.19 63.13 180 bottom
C4544  100pF  [C0402]  14.14 63.13 180 bottom
C4545  100pF  [C0402]  45.18 57.08 180 bottom
C4546  100pF  [C0402]  49.5 51.83 180 bottom
C4547  100pF  [C0402]  33.86 48.65 0 bottom
C4548  100pF  [C0402]  33.94 53.2 0 bottom
C4549  10pF  [C0402]  44.12 39.25 135 bottom
C4550  10pF  [C0402]  44.12 39.9 225 bottom
C4551  10pF  [C0402]  37.79 39.25 45 bottom
C4552  10pF  [C0402]  37.79 39.9 315 bottom
C4553  10pF  [C0402]  49.58 45.72 0 bottom
C4554  100pF  [C0402]  61.13 37.08 315 bottom
C4555  100pF  [C0402]  55.37 37.08 225 bottom
C4556  100pF  [C0402]  55.37 37.72 135 bottom
C4557  100pF  [C0402]  61.13 37.72 45 bottom
C4558  100pF  [C0402]  46.66 109.71 225 top
C4559  100pF  [C0402]  46.95 104.06 315 top
C4560  100pF  [C0402]  41.4 100.74 270 top
C4561  100pF  [C0402]  35.86 104.06 225 top
C4562  100pF  [C0402]  35.57 109.71 315 top
C4563  100pF  [C0402]  34.92 109.71 225 top
C4564  100pF  [C0402]  47.31 109.71 315 top
C4565  100pF  [C0402]  35.21 104.06 315 top
C4566  100pF  [C0402]  47.59 104.06 225 top
C4567  47pF  [C0402]  127.6 121.03 270 top
C4569  0.1uF  [C0402]  127.01 102.59 270 bottom
C4570  0.1uF  [C0402]  125.97 102.59 270 bottom
C4571  0.1uF  [C0402]  122.78 103.72 180 bottom
C4572  0.1uF  [C0402]  129.37 102.59 270 bottom
C4573  0.1uF  [C0402]  128.31 102.59 270 bottom
C4574  0.1uF  [C0402]  132.36 104.76 0 bottom
C4575  0.1uF  [C0402]  124.94 66.69 180 bottom
C4576  0.1uF  [C0402]  128.99 68.86 90 bottom
C4577  0.1uF  [C0402]  127.93 68.86 90 bottom
C4578  0.1uF  [C0402]  131.33 68.86 90 bottom
C4579  0.1uF  [C0402]  130.29 68.86 90 bottom
C4580  0.1uF  [C0402]  134.59 67.73 0 bottom
C4581  0.1uF  [C0402]  89.05 125.34 0 bottom
C4582  0.1uF  [C0402]  85 122.02 270 bottom
C4583  0.1uF  [C0402]  86.07 122.02 270 bottom
C4584  0.1uF  [C0402]  79.22 124.47 180 bottom
C4585  0.1uF  [C0402]  82.66 122.02 270 bottom
C4586  0.1uF  [C0402]  83.71 122.02 270 bottom
C4587  0.1uF  [C0402]  83.03 63.41 0 top
C4588  0.1uF  [C0402]  83.03 62.42 0 top
C4589  0.1uF  [C0402]  75.92 62.65 180 top
C4590  0.1uF  [C0402]  75.92 63.64 180 top
C4591  0.1uF  [C0402]  46.13 104.13 0 bottom
C4592  0.1uF  [C0402]  43.27 101.96 270 bottom
C4593  0.1uF  [C0402]  42.2 101.96 270 bottom
C4594  0.1uF  [C0402]  36.55 103.09 180 bottom
C4595  0.1uF  [C0402]  40.65 101.96 270 bottom
C4596  0.1uF  [C0402]  39.61 101.96 270 bottom
C4597  0.1uF  [C0402]  38.82 68.86 90 bottom
C4598  0.1uF  [C0402]  34.9 66.69 180 bottom
C4599  0.1uF  [C0402]  37.76 68.86 90 bottom
C4600  0.1uF  [C0402]  40.37 68.86 90 bottom
C4601  0.1uF  [C0402]  41.41 68.86 90 bottom
C4602  0.1uF  [C0402]  44.55 67.73 0 bottom
C4603  0.1uF  [C0402]  96.23 99.21 90 top
C4604  0.1uF  [C0402]  88.34 98.63 180 top
C4605  0.1uF  [C0402]  100.04 126.66 180 bottom
C4606  0.1uF  [C0402]  100.04 121.61 180 bottom
C4607  0.1uF  [C0402]  13.77 103.53 90 top
C4613  0.1uF  [C0402]  140.03 140.43 180 top
C4614  10pF  [C0402]  140.03 141.52 180 top
C4615  0.1uF  [C0402]  118.63 95.35 270 top
C4616  10pF  [C0402]  117.54 95.35 270 top
C4617  0.1uF  [C0402]  39.79 142.85 90 top
C4618  10pF  [C0402]  38.69 142.85 90 top
C4619  0.1uF  [C0402]  32.07 95.35 270 top
C4620  10pF  [C0402]  30.97 95.35 270 top
C4625  47pF  [C0402]  124.51 39.58 180 bottom
C4626  10pF  [C0402]  123.6 39.58 0 bottom
C4627  10pF  [C0402]  41.22 39.9 315 bottom
C4628  10pF  [C0402]  40.57 39.9 45 bottom
C4629  10pF  [C0402]  127.14 110.92 0 top
C4630  10pF  [C0402]  128.06 110.92 180 top
C4631  10pF  [C0402]  128.35 102.08 0 top
C4632  10pF  [C0402]  127.43 102.08 180 top
C4633  10pF  [C0402]  40.66 111.3 0 top
C4634  10pF  [C0402]  41.57 111.3 180 top
C4635  10pF  [C0402]  40.94 102.46 180 top
C4636  10pF  [C0402]  41.86 102.46 0 top
C4637  100pF  [C0402]  144.19 36.43 225 bottom
C4638  47pF  [C0402]  144.84 36.43 315 bottom
C4639  100pF  [C0402]  58.57 37.72 315 bottom
C4640  100pF  [C0402]  57.92 37.72 225 bottom
C4641  18pF  [C0402]  148.54 135.38 0 bottom
C4642  18pF  [C0402]  28.87 145.03 180 bottom
C4643  18pF  [C0402]  142.88 136.14 270 bottom
C4644  18pF  [C0402]  140.88 125.33 0 bottom
C4645  18pF  [C0402]  134.37 59.56 90 bottom
C4646  18pF  [C0402]  138.66 54.2 90 bottom
C4647  18pF  [C0402]  124.84 46.15 270 bottom
C4648  18pF  [C0402]  124.94 50.89 270 bottom
C4649  18pF  [C0402]  134.24 92.97 0 top
C4650  18pF  [C0402]  138.07 61.67 0 top
C4651  0.1uF  [C0402]  19.41 108.69 270 top
C4652  10pF  [C0402]  18.34 108.69 270 top
C4653  10pF  [C0402]  110.18 124.26 90 top
C4654  18pF  [C0402]  47.37 93.65 0 top
C4655  18pF  [C0402]  48.69 61.75 0 top
C4656  18pF  [C0402]  34.39 46.1 270 bottom
C4657  18pF  [C0402]  34.52 50.84 270 bottom
C4658  18pF  [C0402]  44.63 59.54 90 bottom
C4659  18pF  [C0402]  48.97 54.18 90 bottom
C4660  18pF  [C0402]  123.87 114.17 180 top
C4661  18pF  [C0402]  35.18 144.22 90 bottom
C4662  0.1uF  [C0402]  62.42 105 90 top
C4663  0.1uF  [C0402]  101.14 55.38 0 bottom
C4664  0.1uF  [C0402]  12.47 55.38 0 bottom
C4665  18pF  [C0402]  138.91 141.17 90 bottom
C4666  18pF  [C0402]  136.3 130.73 0 bottom
C4667  18pF  [C0402]  42.33 140.17 90 bottom
C4668  18pF  [C0402]  43.67 126.67 180 bottom
C4669  0.1uF  [C0402]  168.46 98.2 270 bottom
C4670  0.1uF  [C0402]  8.88 109.98 90 bottom
C4671  1000PF  [C0402]  166.85 98.71 180 bottom
C4672  1000PF  [C0402]  165.89 108.06 180 bottom
C4673  1000PF  [C0402]  10.49 109.47 0 bottom
C4674  1000PF  [C0402]  11.46 100.12 0 bottom
C4677  10pF  [C0402]  68.63 123.52 270 top
C4678  10pF  [C0402]  68.63 118.74 270 top
C4679  10pF  [C0402]  68.63 124.43 90 top
C4680  10pF  [C0402]  68.63 119.66 90 top
C4681  10pF  [C0402]  123.55 122.94 90 bottom
C4682  10pF  [C0402]  144.42 123.28 90 bottom
C4683  10pF  [C0402]  30.43 125.12 90 bottom
C4684  10pF  [C0402]  54.41 125.46 90 bottom
C4685  10pF  [C0402]  151.57 103.24 180 bottom
C4686  10pF  [C0402]  157.01 63.03 0 bottom
C4687  10pF  [C0402]  111.32 103.2 180 bottom
C4688  10pF  [C0402]  116.57 63.03 0 bottom
C4689  10pF  [C0402]  61.81 103.2 180 bottom
C4690  10pF  [C0402]  67.25 63.03 0 bottom
C4691  10pF  [C0402]  20.92 103.2 180 bottom
C4692  10pF  [C0402]  26.17 63.03 0 bottom
CON1  -  [19S101-40ML5]  7.24 149.61 180 bottom
CON2  -  [19S101-40ML5]  170.56 149.61 180 bottom
CON3  -  [19S101-40ML5]  59.31 149.61 180 bottom
CON4  -  [19S101-40ML5]  118.49 149.61 180 bottom
D5  B530C-13-F  [B530C_13_F]  50.92 122.33 0 top
D10  SMDJ16CA  [SMDJ36CA]  47.56 115.8 180 top
D26  LED  [LED_LTST-C190]  147.05 108.02 0 bottom
D134  LED  [LED_LTST-C190]  143.77 119.45 180 bottom
D3000  BAT54  [SOT23]  78.59 127.04 0 top
D3001  BAT54  [SOT23]  80.32 99.99 270 bottom
D10126  LED  [LED_LTST-C190]  48.49 112.69 270 bottom
FB5  120E  [INDC1608X95M]  135.57 97.19 0 top
FB6  120E  [INDC1608X95M]  135.57 99.1 0 top
FB19  60E  [FB0603]  155.97 56.07 0 top
FB2200  120E  [FB0603]  120.91 114.72 180 bottom
FB2201  120E  [FB0603]  158.03 117.16 270 bottom
FB2202  120E  [FB0603]  126.52 129.21 180 bottom
FB2300  120E  [FB0603]  98.36 69.46 180 bottom
FB2301  120E  [FB0603]  115.5 74.56 0 bottom
FB2400  120E  [FB0603]  135.78 74.03 0 bottom
FB2401  120E  [FB0603]  156.02 74.56 0 bottom
FB2500  120E  [FB0603]  135.36 59.57 0 top
FB2800  120E  [FB0603]  30.52 114.72 180 bottom
FB2801  120E  [FB0603]  68.26 117.16 270 bottom
FB2802  120E  [FB0603]  35.76 129.01 180 bottom
FB2900  120E  [FB0603]  8.39 69.43 180 bottom
FB2901  120E  [FB0603]  25.23 74.69 0 bottom
FB3000  120E  [FB0603]  45.89 74.16 0 bottom
FB3001  120E  [FB0603]  66.2 74.74 0 bottom
FB3409  100E / 3A  [FB0603]  55.5 115.87 0 top
FB3410  100E / 3A  [FB0603]  55.5 113.41 0 top
FB3411  100E / 3A  [FB0603]  55.5 110.86 0 top
FB3412  120E  [FB0603]  135.9 88.4 0 bottom
FB3413  120E  [FB0603]  156 87.55 0 bottom
FB3414  120E  [FB0603]  97.22 89.93 180 bottom
FB3415  120E  [FB0603]  115.62 87.59 0 bottom
FB3416  120E  [FB0603]  45.89 88.91 0 bottom
FB3417  120E  [FB0603]  66.2 87.59 0 bottom
FB3418  120E  [FB0603]  8.39 92.87 180 bottom
FB3419  120E  [FB0603]  25.31 87.64 0 bottom
FB6312  120E  [FB0603]  90.93 123.33 180 bottom
FB6321  75E  [FB0402]  140.07 133.76 180 bottom
FB6322  75E  [FB0402]  147.96 133.24 90 bottom
FB6323  75E  [FB0402]  29.97 147.27 270 bottom
FB6324  75E  [FB0402]  38.93 146.48 0 bottom
FB6326  75E  [FB0402]  123.85 112.96 180 top
FB6327  120E  [FB0603]  130.64 59.57 180 top
FB6328  120E  [FB0603]  46.02 59.63 0 top
FB6329  120E  [FB0603]  40.93 59.63 180 top
FB6330  100E / 3A  [FB0603]  55.5 108.39 0 top
FB6331  120E  [FB0603]  82.5 67.42 90 top
FB6332  75E  [FB0402]  141.07 127.71 0 bottom
FL2500  FAR-F6KA-1G7475-D4CY  [FLT_FAR-F6KA-1G5754-L4AJ]  120.74 106.4 90 top
FL2501  FAR-F6KA-1G8800-L4AF  [FIL_FAR-F5KA-836M50-D4DF]  123.3 106.4 90 top
FL2502  FAR-F5KA-836M50-D4DF  [FIL_FAR-F5KA-836M50-D4DF]  135.04 106.4 90 top
FL2503  FAR-F5KA-897M50-D4DC  [FIL_FAR-F5KA-836M50-D4DF]  132.47 106.4 90 top
FL2700  UPD003A  [FIL_UPD003A_SM]  104.05 30.66 180 bottom
FL2701  UPD002A  [FIL_UPD002A_SM]  99.22 45.18 180 top
FL2702  CER0207A  [FIL_CER0207A]  159.18 54.38 270 bottom
FL2703  CER0574A  [FIL_CER0574A]  108.51 30.06 0 top
FL3100  FAR-F6KA-1G7475-D4CY  [FLT_FAR-F6KA-1G5754-L4AJ]  34.25 106.79 90 top
FL3101  FAR-F6KA-1G8800-L4AF  [FIL_FAR-F5KA-836M50-D4DF]  36.82 106.79 90 top
FL3102  FAR-F5KA-836M50-D4DF-Z  [FIL_FAR-F5KA-836M50-D4DF]  48.55 106.79 90 top
FL3103  FAR-F5KA-897M50-D4DC  [FIL_FAR-F5KA-836M50-D4DF]  45.99 106.79 90 top
FL3300  UPD003A  [FIL_UPD003A_SM]  21.24 30.91 180 bottom
FL3301  UPD002A  [FIL_UPD002A_SM]  12.61 45.18 180 top
FL3302  CER0207A  [FIL_CER0207A]  71.92 52.54 270 bottom
FL3303  CER0574A  [FIL_CER0574A]  24.94 30.06 0 top
FL3310  SAFFB942MAN0F0A  [FIL_SAFFB942MAN0F0A]  140.87 123.11 0 bottom
FL3312  SAFFB1G84AB0F0A  [FIL_SAFFB1G84AB0F0A]  129.19 123.11 180 bottom
FL3313  SAFFB1G84AB0F0A  [FIL_SAFFB1G84AB0F0A]  37.21 125.29 180 bottom
FL3314  SAFFB942MAN0F0A  [FIL_SAFFB942MAN0F0A]  50.48 125.29 0 bottom
FL3316  SAYEY897MBC0B0A  [FIL_SAYEY897MBC0B0A]  128.1 118.66 270 top
J4  SIM CONNECTOR  [JAE_SF56S006V4BR2000]  161.82 103.9 90 top
J10  22-05-7035  [HEADER_3]  88.86 6.59 180 bottom
J2701  28K50A-40ML5  [QMA_28K50A-40ML5]  143.51 45.72 180 bottom
J3302  28K50A-40ML5  [QMA_28K50A-40ML5]  57.66 45.72 180 bottom
J3303  CONNECTOR  [CONN_76450-3607]  106.86 148.16 0 bottom
JP3  -  [1758759]  36.88 120.74 180 top
L13  2.2uH  [WURTH_744777910]  166.88 50.94 180 top
L30  2.2uH  [L0805]  151.62 136.11 270 bottom
L32  2.2uH  [L0805]  25.87 143.84 90 bottom
L1516  150nH  [L0603]  147.99 139.96 90 bottom
L1521  150nH  [L0603]  29.72 140.46 270 bottom
L2200  18nH  [L0402]  109.52 119.13 270 bottom
L2201  18nH  [L0402]  112.27 114.74 180 bottom
L2203  4.7nH  [L0402]  112.27 111.12 0 bottom
L2205  3.3nH  [L0402]  119.18 122.89 270 bottom
L2208  15nH  [L0402]  149.02 118.36 270 bottom
L2209  6.8nH  [L0402]  152.53 114.36 180 bottom
L2212  9.1 nH  [L0402]  147.75 123.32 90 bottom
L2213  8.2nH  [L0402]  152.53 111.12 0 bottom
L2214  100nH  [L0603]  135.09 133.96 0 bottom
L2300  1nH  [L0402]  111.77 92.49 270 bottom
L2302  4.9nH  [L0603]  112.32 70.1 0 bottom
L2303  4.9nH  [L0603]  108.51 90.4 90 bottom
L2304  1nH  [L0402]  116.32 92.49 270 bottom
L2306  4.9nH  [L0603]  115.37 70.1 180 bottom
L2307  4.9nH  [L0603]  119.58 90.4 90 bottom
L2400  1nH  [L0402]  152.03 92.49 270 bottom
L2402  4.9nH  [L0603]  148.77 90.4 90 bottom
L2403  4.9nH  [L0603]  152.76 70.1 0 bottom
L2405  1nH  [L0402]  156.58 92.49 270 bottom
L2406  4.9nH  [L0603]  159.84 90.4 90 bottom
L2407  4.9nH  [L0603]  155.8 70.1 180 bottom
L2500  8.2nH  [L0402]  137.69 66.36 90 top
L2800  18nH  [L0402]  19 119.13 270 bottom
L2801  18nH  [L0402]  21.87 114.74 180 bottom
L2803  4.7nH  [L0402]  21.87 111.12 0 bottom
L2805  3.3nH  [L0402]  25.45 123.88 315 bottom
L2808  15nH  [L0402]  59.77 119 270 bottom
L2809  6.8nH  [L0402]  62.77 114.36 180 bottom
L2812  9.1 nH  [L0402]  57.87 124.5 270 bottom
L2813  8.2nH  [L0402]  62.77 111.12 0 bottom
L2814  100nH  [L0603]  43.37 130.17 0 bottom
L2900  1nH  [L0402]  21.37 92.49 270 bottom
L2902  4.9nH  [L0603]  21.92 70.1 0 bottom
L2903  4.9nH  [L0603]  18.11 90.4 90 bottom
L2905  1nH  [L0402]  25.92 92.49 270 bottom
L2906  4.9nH  [L0603]  24.97 70.1 180 bottom
L2907  4.9nH  [L0603]  29.19 90.4 90 bottom
L3000  1nH  [L0402]  62.27 92.49 270 bottom
L3002  4.9nH  [L0603]  59 90.4 90 bottom
L3003  4.9nH  [L0603]  62.99 70.1 0 bottom
L3004  1nH  [L0402]  66.81 92.49 270 bottom
L3006  4.9nH  [L0603]  70.08 90.4 90 bottom
L3007  4.9nH  [L0603]  66.04 70.1 180 bottom
L3500  3.3uH  [INDM6965X300N]  92.08 102.9 270 bottom
L3501  3.3uH  [INDM6965X300N]  91.88 116.25 0 top
L3502  2.2nH  [L0402]  148.11 66.86 0 top
L3503  15nH  [L0402]  142.52 67.36 90 top
L3504  2.2nH  [L0402]  58.78 66.86 0 top
L3505  15nH  [L0402]  53.19 67.36 90 top
L3506  8.2nH  [L0402]  48.11 66.36 90 top
MH1  Mounting_Hole  [MTG370X800]  5.49 18.19 0 top
MH2  Mounting_Hole  [MTG370X800]  172.31 18.19 0 top
MH3  Mounting_Hole  [MTG370X800]  172.31 133.6 0 top
MH4  Mounting_Hole  [MTG370X800]  88.9 78.74 0 top
MH5  Mounting_Hole  [MTG370X800]  54.61 97.79 0 top
MH6  Mounting_Hole  [MTG370X800]  142.88 97.79 0 top
MH7  Mounting_Hole  [MTG370X800]  88.9 18.19 0 top
MH8  Mounting_Hole  [MTG370X800]  5.49 133.6 0 top
NOREF  -  []  129.76 122.63 0 top
NOREF#2  -  []  51.5 138.67 0 top
NOREF#3  -  []  113.28 0 90 top
NOREF#4  -  []  0 16.63 0 top
NOREF#5  -  []  27.64 144.43 0 top
NOREF#6  -  []  28.66 147.28 0 top
NOREF#7  -  []  50.95 150.69 0 top
NOREF#8  -  []  0 156.46 0 top
NOREF#9  -  []  123.92 142.98 90 top
NOREF#10  -  []  67.31 150.88 0 top
NOREF#11  -  [unnamed#2]  7.7 125.26 0 top
NOREF#12  -  []  176.78 12.7 90 top
NOREF#13  -  []  4.89 12.7 90 top
NOREF#14  -  []  38.94 124.82 90 top
NOREF#15  -  []  129.19 123.39 0 top
NOREF#16  -  []  128.76 122.82 90 top
NOREF#17  -  []  140.45 123.11 0 top
NOREF#18  -  []  36.79 125 90 top
NOREF#19  -  []  50.05 125.29 0 top
NOREF#20  -  []  21.14 138.83 90 top
NOREF#21  -  [unnamed#2]  6.35 26.67 0 top
NOREF#22  -  []  37.21 125.58 0 top
NOREF#23  -  []  114.3 1.02 0 top
NOREF#24  -  []  130.91 122.63 90 top
NOREF#25  -  []  63.5 1.02 0 top
NOREF#26  -  []  21.14 144.43 0 top
NOREF#27  -  []  141.3 122.82 90 top
NOREF#28  -  []  176.78 157.48 315 top
NOREF#29  -  []  56.55 143.54 90 top
NOREF#30  -  []  123.92 142.98 0 top
NOREF#31  -  []  37.79 124.82 0 top
NOREF#32  -  []  141.45 121.68 90 top
NOREF#33  -  []  56.55 143.54 90 top
NOREF#34  -  []  33.16 139.38 90 top
NOREF#35  -  []  123.92 149.48 90 top
NOREF#36  -  []  0 13.72 0 top
NOREF#37  -  [unnamed#2]  165.32 22.24 0 top
NOREF#38  -  []  51.05 123.87 90 top
NOREF#39  -  []  128.97 146.01 0 top
NOREF#40  -  []  136.87 146.01 90 top
NOREF#41  -  []  50.9 125 90 top
NOREF#42  -  []  68.33 149.86 90 top
NOREF#43  -  []  59.4 138.67 90 top
NOREF#44  -  []  49.9 123.87 0 top
NOREF#45  -  []  140.3 121.68 0 top
NOREF#46  -  [unnamed#2]  7.7 125.26 180 bottom
NOREF#47  -  [unnamed#2]  165.32 22.24 180 bottom
NOREF#48  -  [unnamed#2]  6.35 26.67 180 bottom
Q3  TRANS NPN/PNP 20V 4A/3.5A SOT23  [SOT95P280X140-6N]  152.19 132.45 180 bottom
Q4  TRANS NPN/PNP 20V 4A/3.5A SOT23  [SOT95P280X140-6N]  25.23 147.6 0 bottom
Q32  PMBT3906  [SOT95P230X110-3N]  140.09 118.46 0 bottom
Q40  MMBT3904  [SOT23]  162.98 93.57 0 bottom
Q41  MMBT3904  [SOT23]  125.77 92.32 270 bottom
Q42  MMBT3904  [SOT23]  48.67 92.19 90 bottom
Q43  MMBT3904  [SOT23]  16.52 94.45 0 bottom
Q120  2N7002L  [SOT23]  158.46 39.76 0 top
Q138  2N7002L  [SOT23]  135.65 137.93 270 top
Q4200  MMBT2222ALT1  [SOT23]  131.7 92.6 90 bottom
Q4201  MMBT2222ALT1  [SOT23]  121.41 95.21 90 bottom
Q4202  MMBT2222ALT1  [SOT23]  40.77 92.8 90 bottom
Q4203  MMBT2222ALT1  [SOT23]  31.29 94.15 90 bottom
R1P21  10K  [SMR0402A]  65.8 125.96 270 top
R1P22  10K  [SMR0402A]  64.91 127.13 90 top
R1P23  10K  [SMR0402A]  64.91 128.3 90 top
R1P27  10K  [SMR0402A]  48.91 127.23 90 top
R1P28  10K  [SMR0402A]  49.8 126.06 270 top
R1P29  10K  [SMR0402A]  48.91 128.3 90 top
R49  1K  [R0402]  154.56 132.1 270 bottom
R91  0  [RC0402]  138.55 127.6 270 top
R221  200  [R0402]  144.5 116.63 90 bottom
R250  0E  [R0402]  38.71 128.23 0 top
R251  0E  [R0402]  38.71 127.1 0 top
R254  0E  [R0402]  54.81 127.82 0 top
R255  0E  [R0402]  54.81 126.69 0 top
R267  0E  [R0402]  51.54 127.15 0 top
R268  0E  [R0402]  51.54 128.3 0 top
R269  0E  [R0402]  67.54 127.15 0 top
R270  0E  [R0402]  67.54 128.3 0 top
R287  10K  [RC0402]  148.39 138.37 90 top
R291  100K  [SMR0402A]  145.59 137.93 180 top
R322  100K  [RC0402]  140.86 104.74 90 top
R325  470  [RC0402]  143.95 108.02 0 bottom
R364  0  [RC0402]  167.61 116.94 0 top
R380  10K  [RC0402]  144.19 111.4 90 top
R384  0  [RC0402]  163.44 111.4 270 top
R387  0  [RC0402]  157.37 111.4 270 top
R388  0  [RC0402]  158.84 111.4 270 top
R389  0  [RC0402]  160.34 111.4 270 top
R392  10K  [RC0402]  149.79 111.4 270 top
R393  430  [RC0402]  138.75 136.55 270 top
R404  10K  [RC0402]  161.89 111.4 90 top
R405  100K  [SMR0402A]  151.19 137.93 180 top
R500  10k  [R0402]  46.72 132.25 90 top
R501  10k  [R0402]  49.57 135.02 180 top
R502  10k  [R0402]  49.61 137.96 180 top
R503  10k  [R0402]  46.72 140.04 270 top
R504  1K  [R0402]  47.74 132.25 270 top
R505  1K  [R0402]  49.57 134.05 0 top
R506  1K  [R0402]  49.61 138.95 0 top
R507  1K  [R0402]  47.71 140.04 90 top
R508  10k  [R0402]  45.22 140.04 270 top
R509  10k  [R0402]  44.26 140.04 90 top
R510  0E  [R0402]  42.25 135.83 180 top
R511  0E  [R0402]  42.25 136.82 180 top
R512  0E  [R0402]  42.25 137.81 180 top
R513  620E  [R0805]  49.49 115.87 180 bottom
R550  1K  [R0402]  136.86 143.99 0 bottom
R551  1K  [R0402]  136.86 145.18 0 bottom
R552  1K  [R0402]  136.86 146.4 0 bottom
R553  1K  [R0402]  136.86 147.59 0 bottom
R554  1K  [R0402]  136.86 148.81 0 bottom
R555  10K  [R0402]  145.06 146.08 270 bottom
R556  1K  [R0402]  38.32 133.2 90 bottom
R557  1K  [R0402]  37.13 133.2 90 bottom
R558  1K  [R0402]  35.79 133.2 90 bottom
R559  1K  [R0402]  34.47 133.2 90 bottom
R560  1K  [R0402]  33.12 133.2 90 bottom
R561  10K  [R0402]  31.8 133.2 90 bottom
R613  1K  [R0402]  59.18 145.39 0 top
R614  1K  [R0402]  59.18 144.37 0 top
R615  1K  [R0402]  45.88 142.09 180 top
R616  1K  [R0402]  45.88 143.11 180 top
R617  0E  [R0402]  48.13 144.38 0 top
R618  0E  [R0402]  48.13 145.39 0 top
R619  0E  [R0402]  48.13 146.41 0 top
R620  0E  [R0402]  48.13 147.43 0 top
R621  0E  [R0402]  48.13 148.44 0 top
R622  0E  [R0402]  48.13 149.46 0 top
R623  1K  [R0402]  121.03 148.03 180 top
R624  1K  [R0402]  121.03 149.3 180 top
R625  1K  [R0402]  134.59 151.58 0 top
R626  1K  [R0402]  134.59 150.57 0 top
R627  0E  [R0402]  132.33 149.3 180 top
R628  0E  [R0402]  132.33 148.28 180 top
R629  0E  [R0402]  132.33 147.26 180 top
R630  0E  [R0402]  132.33 146.25 180 top
R631  0E  [R0402]  132.33 145.23 180 top
R632  0E  [R0402]  132.33 144.22 180 top
R633  1K  [R0402]  26.44 147.07 90 top
R634  1K  [R0402]  27.46 147.07 90 top
R635  1K  [R0402]  29.6 141.4 90 top
R636  1K  [R0402]  30.61 141.4 90 top
R637  0E  [R0402]  27.45 136.02 90 top
R638  0E  [R0402]  26.44 136.02 90 top
R639  0E  [R0402]  25.42 136.02 90 top
R640  0E  [R0402]  24.4 136.02 90 top
R641  0E  [R0402]  23.39 136.02 90 top
R642  0E  [R0402]  22.37 136.02 90 top
R720  0E  [R0402]  124.71 100.28 0 top
R721  0E  [R0402]  122.5 100.15 0 top
R722  0E  [R0402]  124.71 95.36 0 top
R723  0E  [R0402]  122.5 97.35 0 top
R724  0E  [R0402]  38.22 100.91 0 top
R725  0E  [R0402]  36.02 100.91 0 top
R726  0E  [R0402]  38.22 96 0 top
R727  0E  [R0402]  36.02 97.85 0 top
R760  127K  [RC0402]  167.83 37.22 0 top
R761  402K  [RC0402]  167.33 35.26 270 top
R783  10K  [RC0402]  137.14 119.94 270 bottom
R787  10K  [RC0402]  119.22 126.89 0 top
R789  0  [RC0402]  121.6 123.85 180 top
R790  100K  [SMR0402A]  127.96 125.96 90 top
R791  0  [RC0402]  121.6 126.89 180 top
R792  0  [RC0402]  121.77 133.98 180 top
R793  0  [RC0402]  121.77 137.02 180 top
R794  0  [RC0402]  121.68 128.49 0 top
R795  0  [RC0402]  121.68 132.27 0 top
R796  10K  [RC0402]  119.4 137.02 0 top
R797  10K  [RC0402]  119.35 133.98 0 top
R798  10K  [RC0402]  128.62 128.74 180 top
R799  10K  [RC0402]  128.62 131.81 180 top
R800  100K  [SMR0402A]  128.14 136.1 90 top
R801  100K  [SMR0402A]  128.14 134.8 90 top
R802  100K  [SMR0402A]  122.18 131.01 270 top
R803  100K  [SMR0402A]  122.18 129.71 270 top
R824  100K  [RC0402]  161.45 46.7 0 top
R828  0  [RC0402]  169.44 38.68 0 top
R830  12K  [RC0402]  161.45 48.07 180 top
R831  41.2K  [RC0402]  161.82 39.71 180 top
R840  10K  [R0402]  31.8 134.12 270 bottom
R841  3K  [R0402]  31.8 136.45 90 bottom
R850  0E  [R0402]  156.58 103.65 90 bottom
R851  0E  [R0402]  157.04 102.32 180 bottom
R852  0E  [R0402]  157.04 104.97 180 bottom
R853  0E  [R0402]  147.89 63.13 180 bottom
R854  0E  [R0402]  149.34 63.59 270 bottom
R855  0E  [R0402]  146.44 63.59 270 bottom
R856  0E  [R0402]  116.32 103.65 90 bottom
R857  0E  [R0402]  116.78 102.32 180 bottom
R858  0E  [R0402]  116.78 104.97 180 bottom
R859  0E  [R0402]  107.45 63.13 180 bottom
R860  0E  [R0402]  108.91 63.59 270 bottom
R861  0E  [R0402]  106 63.59 270 bottom
R862  0E  [R0402]  66.81 103.65 90 bottom
R863  0E  [R0402]  67.27 102.32 180 bottom
R864  0E  [R0402]  67.27 104.97 180 bottom
R865  0E  [R0402]  58.13 63.13 180 bottom
R866  0E  [R0402]  59.58 63.59 270 bottom
R867  0E  [R0402]  56.68 63.59 270 bottom
R868  0E  [R0402]  25.92 103.65 90 bottom
R869  0E  [R0402]  26.38 102.32 180 bottom
R870  0E  [R0402]  26.38 104.97 180 bottom
R871  0E  [R0402]  17.06 63.13 180 bottom
R872  0E  [R0402]  18.51 63.59 270 bottom
R873  0E  [R0402]  15.6 63.59 270 bottom
R874  11.8E  [R0402]  137.89 57.1 180 bottom
R875  442E  [R0402]  139.24 57.56 90 bottom
R876  442E  [R0402]  136.55 57.56 90 bottom
R877  71.5E  [R0402]  142.21 51.83 180 bottom
R878  97.6E  [R0402]  143.56 52.29 90 bottom
R879  97.6E  [R0402]  140.86 52.29 90 bottom
R880  11.8E  [R0402]  121.41 48.65 0 bottom
R881  442E  [R0402]  120.07 48.2 270 bottom
R882  442E  [R0402]  122.76 48.2 270 bottom
R883  71.5E  [R0402]  121.41 53.2 0 bottom
R884  97.6E  [R0402]  120.07 52.74 270 bottom
R885  97.6E  [R0402]  122.76 52.74 270 bottom
R886  11.8E  [R0402]  48.11 57.08 180 bottom
R887  442E  [R0402]  49.45 57.54 90 bottom
R888  442E  [R0402]  46.76 57.54 90 bottom
R889  71.5E  [R0402]  52.42 51.83 180 bottom
R890  97.6E  [R0402]  53.77 52.29 90 bottom
R891  97.6E  [R0402]  51.07 52.29 90 bottom
R892  11.8E  [R0402]  31.02 48.65 0 bottom
R893  442E  [R0402]  29.67 48.2 270 bottom
R894  442E  [R0402]  32.36 48.2 270 bottom
R895  71.5E  [R0402]  31.02 53.2 0 bottom
R896  97.6E  [R0402]  29.67 52.74 270 bottom
R897  97.6E  [R0402]  32.36 52.74 270 bottom
R941  10K  [R0402]  145.06 145.16 90 bottom
R942  3K  [R0402]  144.61 143.55 180 bottom
R950  2.2K  [R0402]  150.45 150.68 180 top
R951  2.2K  [R0402]  30.19 148.49 0 top
R953  2.2K  [R0402]  24.47 105.2 270 top
R954  10K  [R0402]  117.12 113.08 90 top
R955  10K  [R0402]  116.07 113.08 90 top
R956  10K  [R0402]  117.57 118.48 90 top
R957  10K  [R0402]  117.56 121.38 90 top
R1040  49.9E  [R1210]  101.85 64.68 270 bottom
R1050  0E  [R0402]  110.36 126.41 270 top
R1150  10K  [R0402]  112.75 113.08 90 top
R1151  10K  [R0402]  113.89 113.08 90 top
R1152  0ohm  [R0402]  115.04 113.08 90 top
R1153  0ohm  [R0402]  112.75 110.92 270 top
R1154  10K  [R0402]  113.89 110.92 270 top
R1155  10K  [R0402]  115.04 110.92 270 top
R1156  0E  [R0402]  110.46 110.92 270 top
R1157  0E  [R0402]  111.61 110.92 270 top
